# Altium PCB 板.PcbDoc (part 1 of 4)
Units mm, origin at the board's own origin, x right, y up, seen from the top; angles counter-clockwise.
Board outline 152.4 x 101.6 mm, 4 copper layers (Top Layer, VCC, GND, Bottom Layer); 183 components, 548 nets, 1331 pads, 689 vias.
Unrouted connection lines stored in the file: 6.
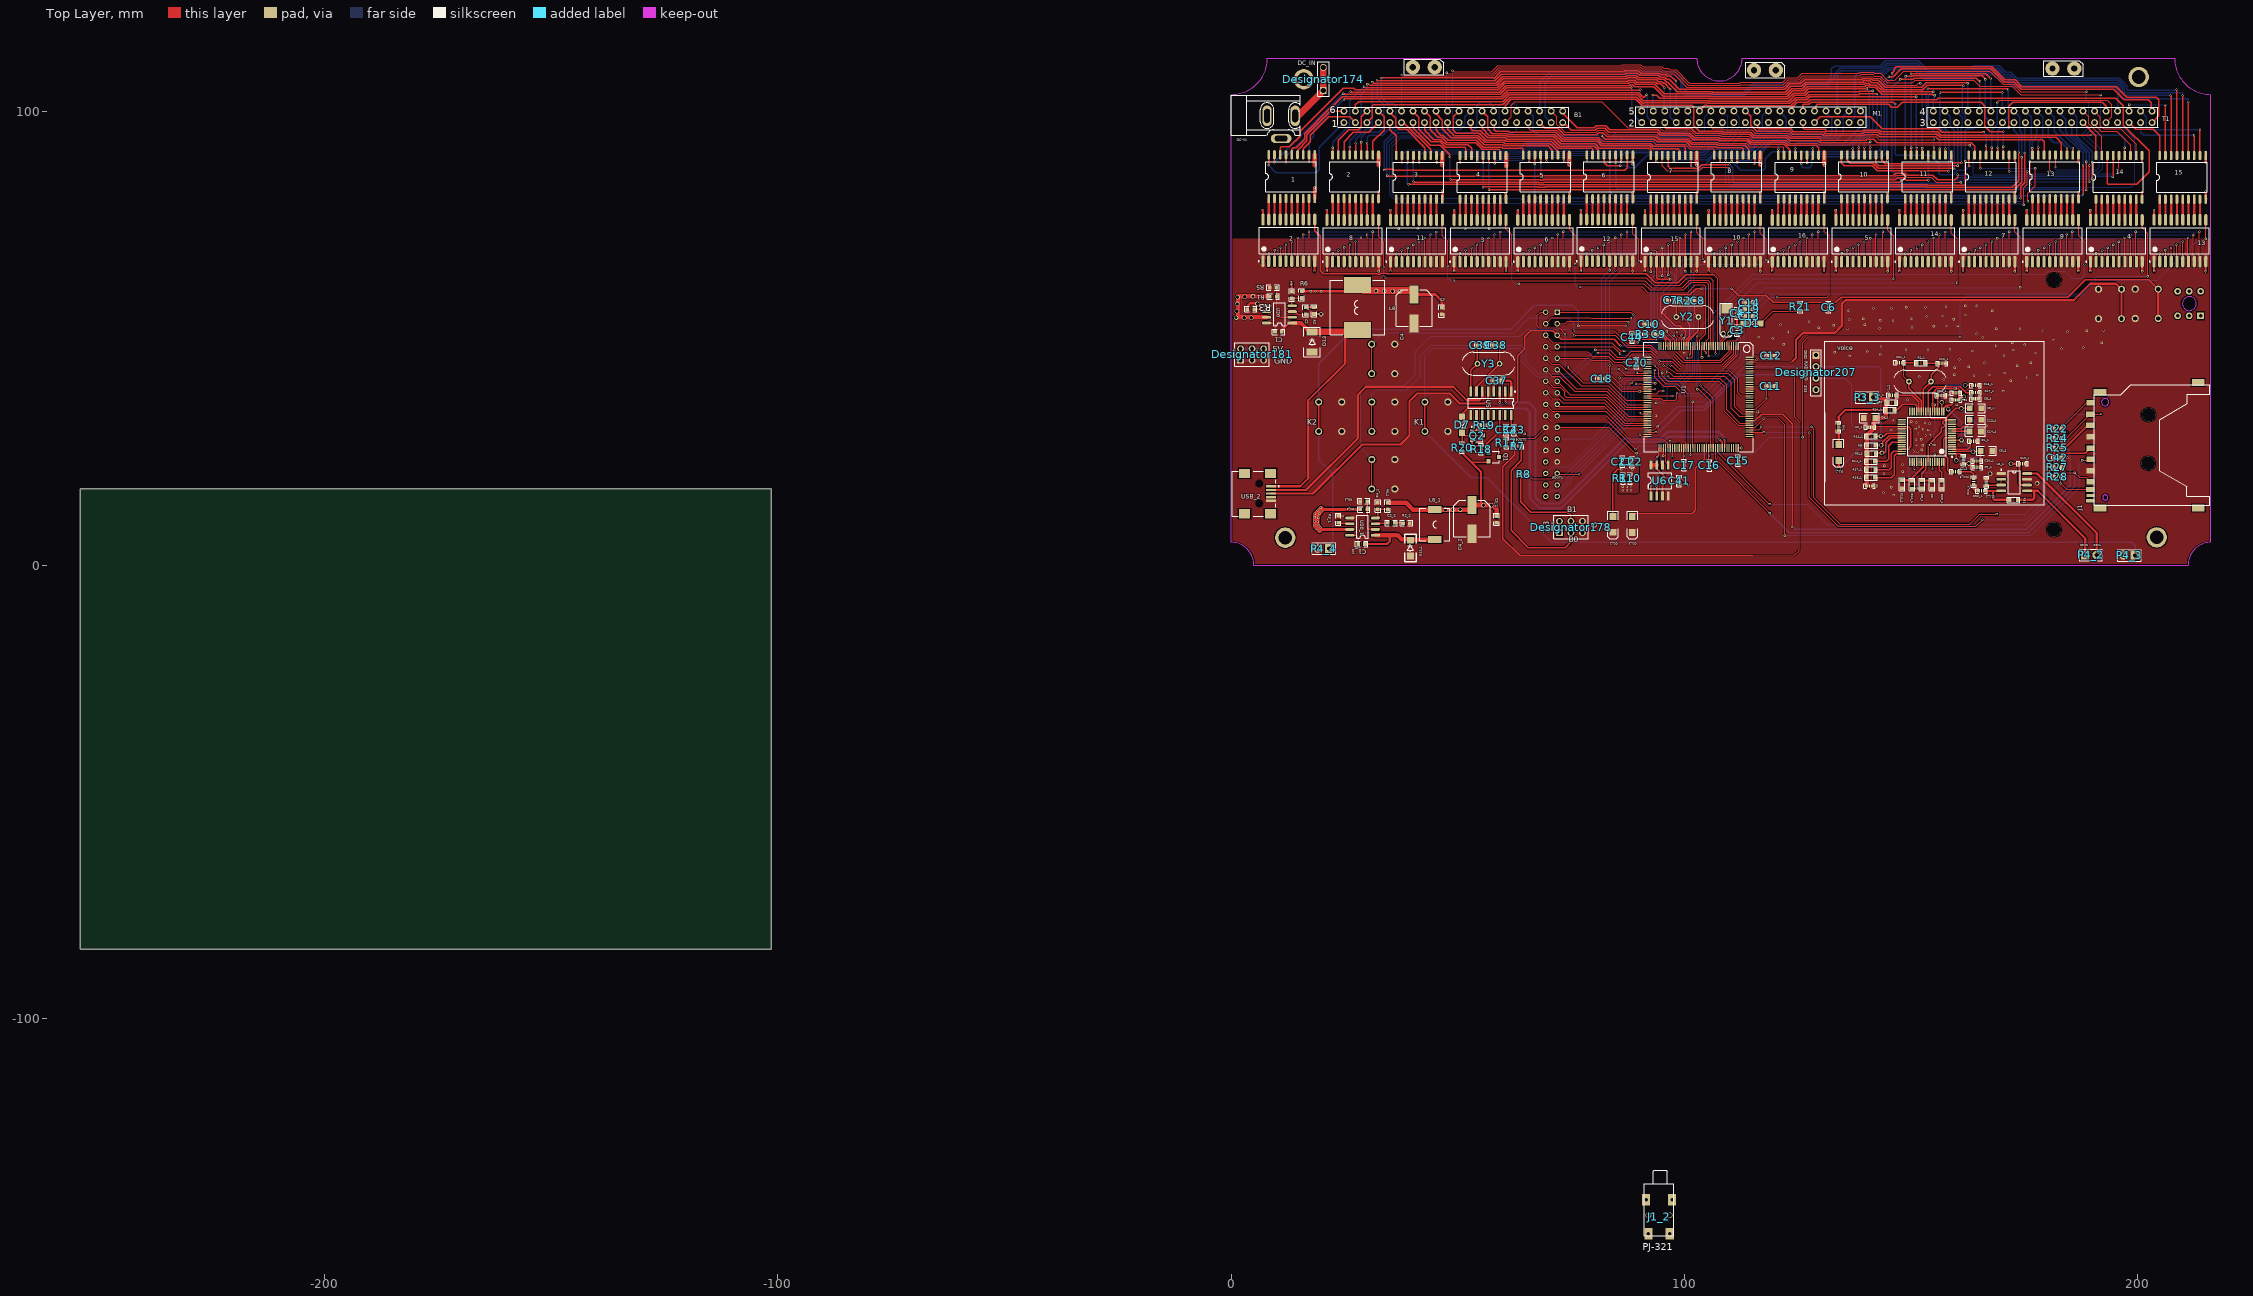
[diagram p0: Top Layer view]
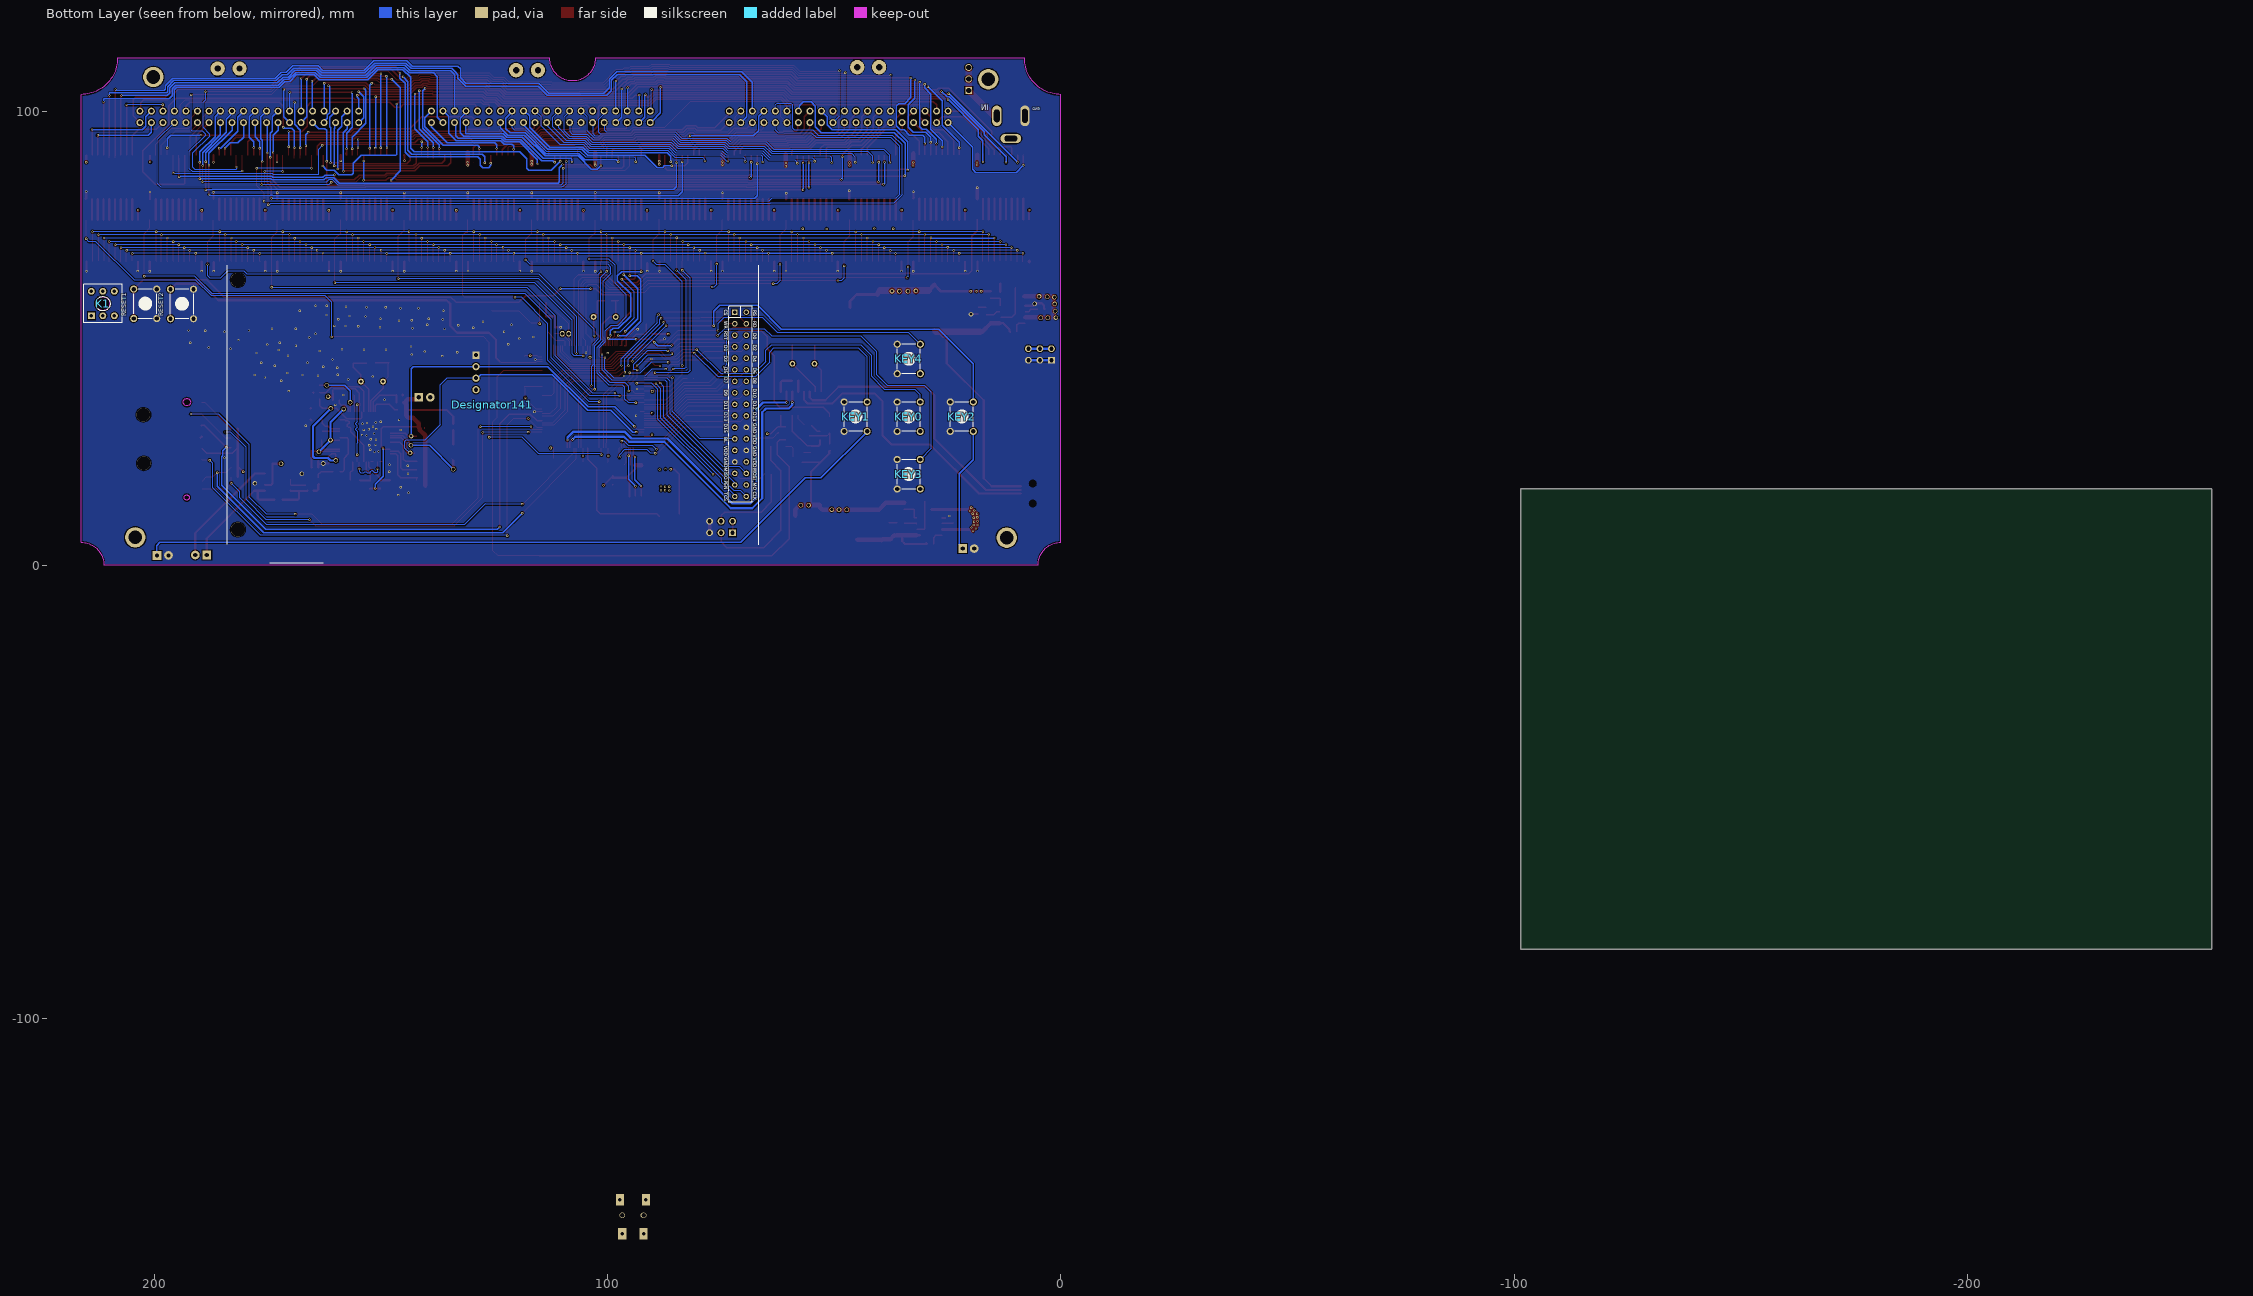
[diagram p1: Bottom Layer view, seen from below]
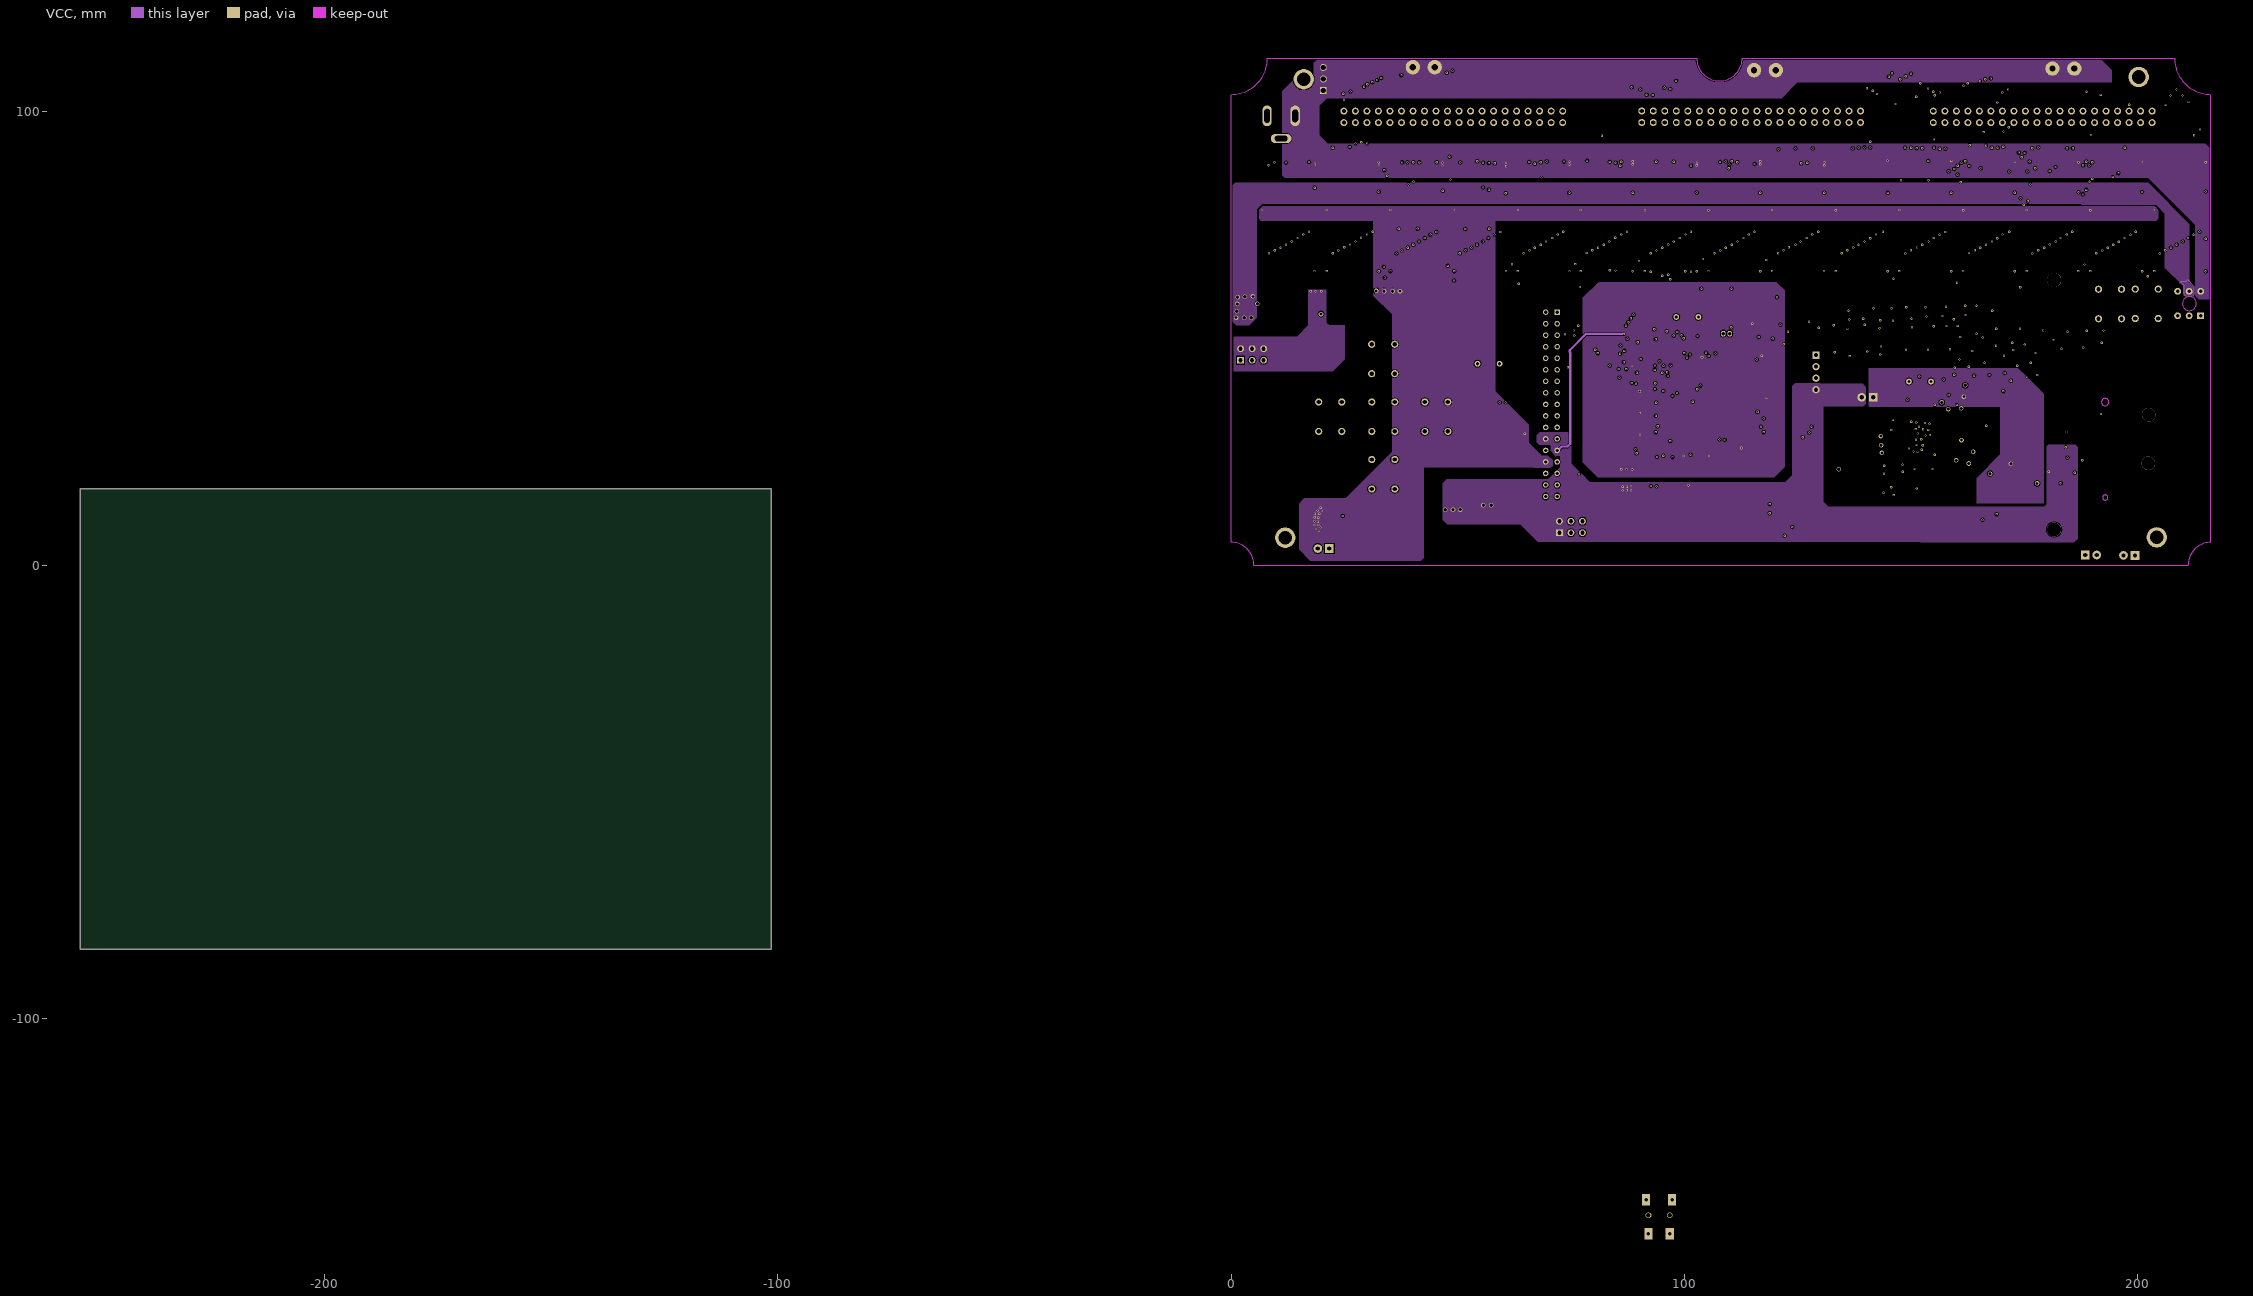
[diagram p2: VCC]
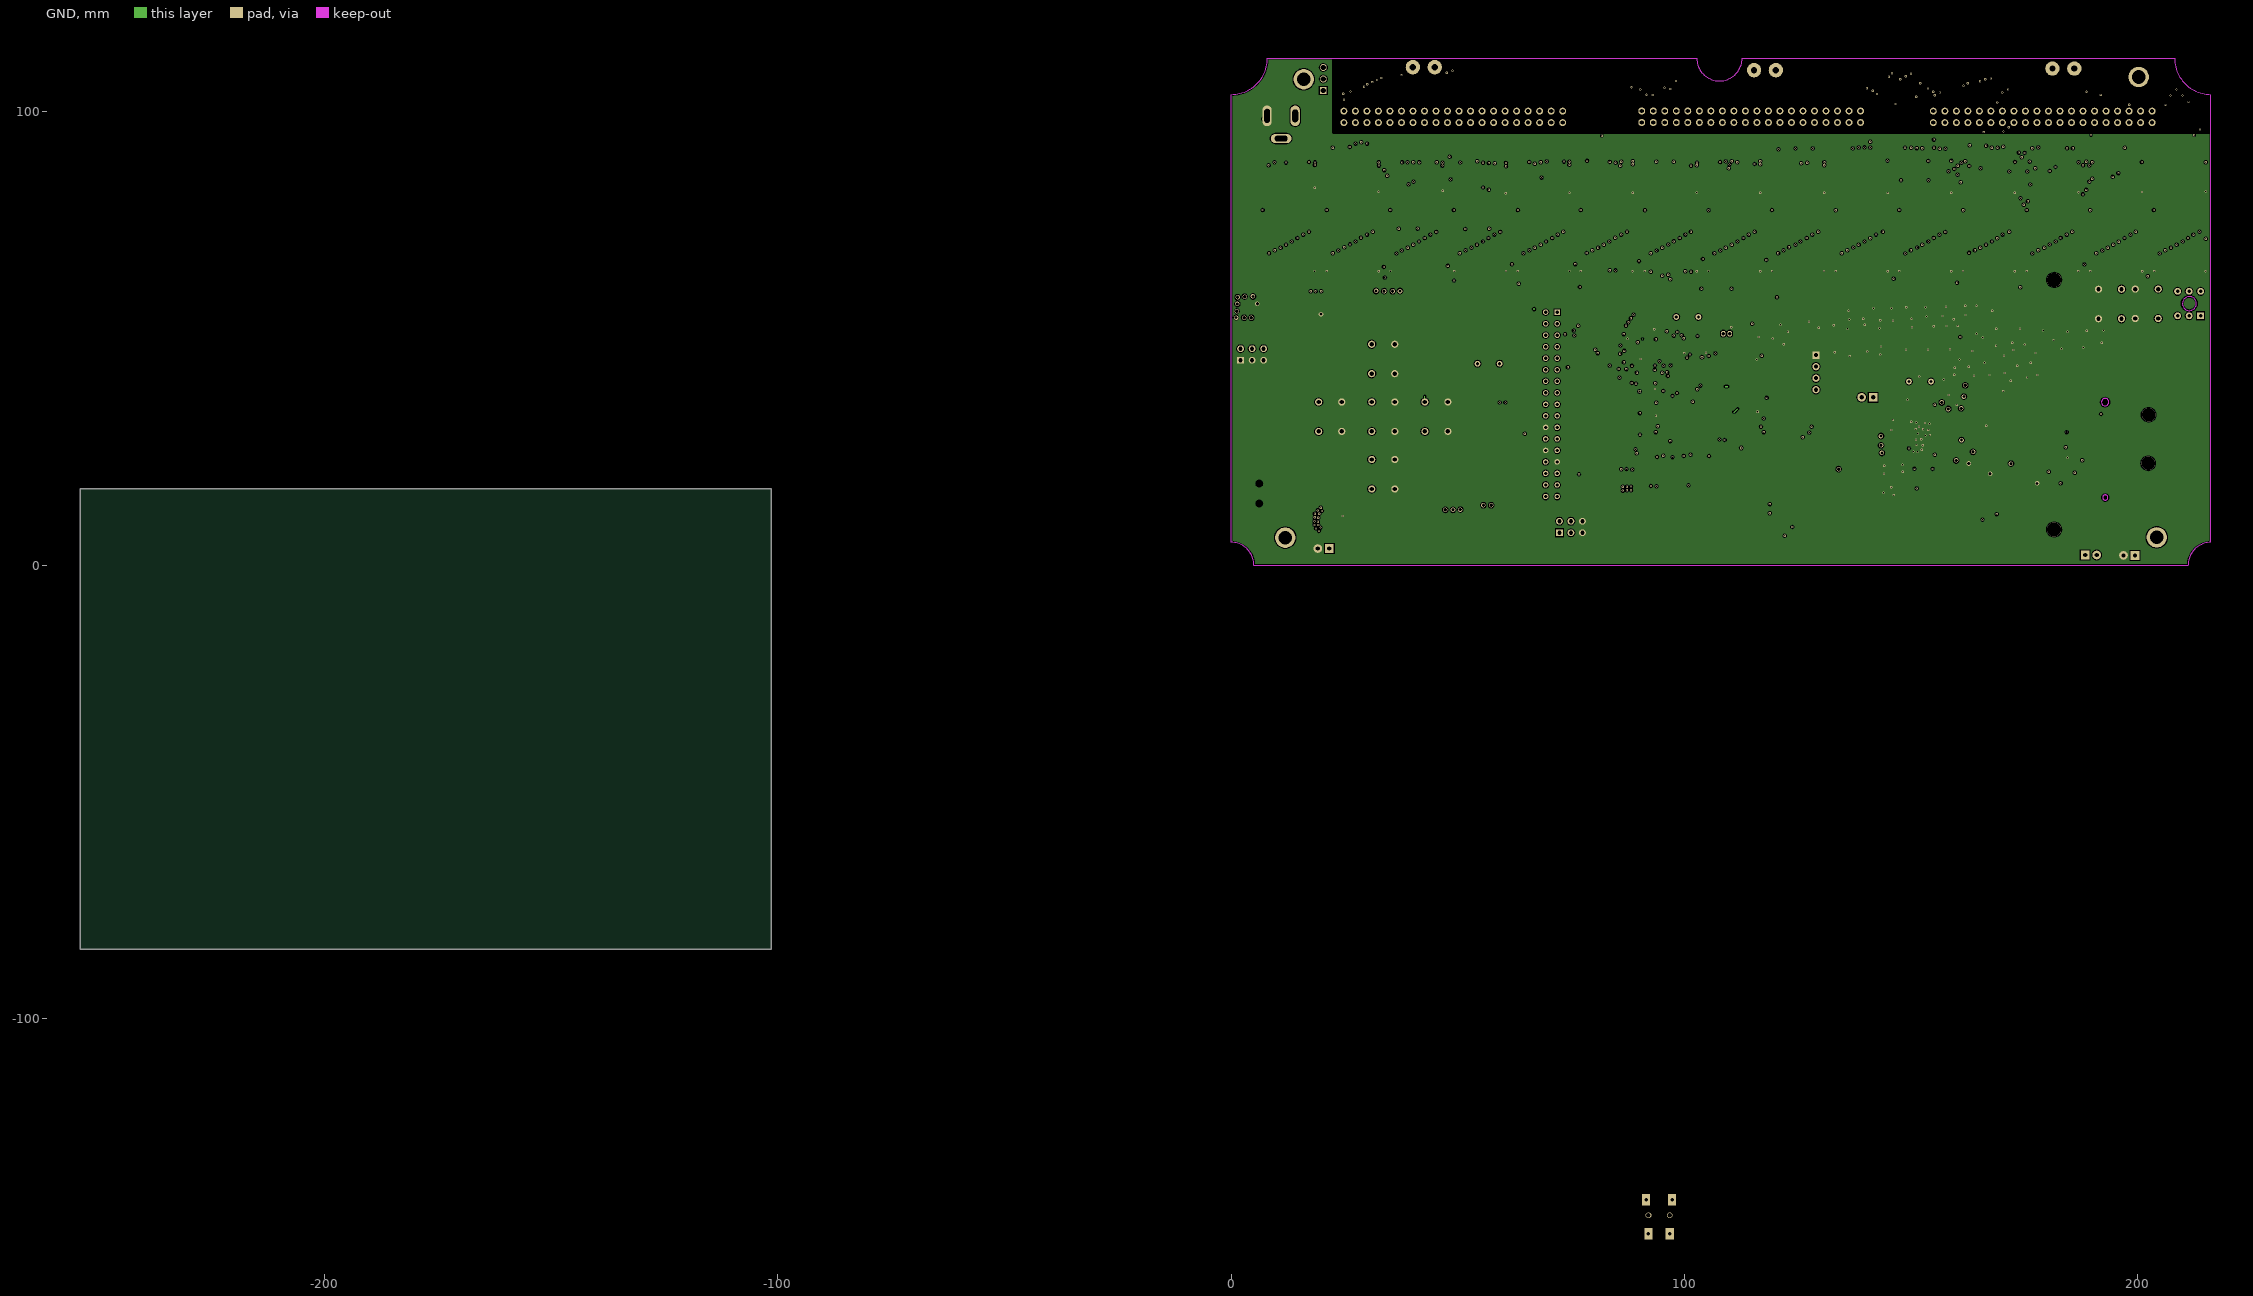
[diagram p3: GND]

## Layer stack, top to bottom
Top Solder: solder mask 0.0102, Solder Resist, Dk 3.5
Top Layer: signal copper 0.0356
Dielectric1: core 0.32, FR-4, Dk 4.8
VCC: signal copper 0.0356
Dielectric2: prepreg 0.32, FR-4, Dk 4.8
GND: signal copper 0.0356
Dielectric3: core 0.32, FR-4, Dk 4.8
Bottom Layer: signal copper 0.0356
Bottom Solder: solder mask 0.0102, Solder Resist, Dk 3.5

## Board outline
-253.83,-84.735 -101.43,-84.735 -101.43,16.865 -253.83,16.865

## Design rules (kind name [scope] priority, off if disabled: settings)
Clearance Clearance_1 [InNet('GND')] p1: gap=0.2 ignorepadtopadclearanceinfootprint=FALSE except(0: Arc-Hole Track-Hole SMDPad-Hole THPad-Hole Via-Hole Fill-Hole Poly-Hole Region-Hole Text-Hole)
Clearance [All] p2: gap=0.2 ignorepadtopadclearanceinfootprint=FALSE except(0: Arc-Hole Track-Hole SMDPad-Hole THPad-Hole Via-Hole Fill-Hole Poly-Hole Region-Hole Text-Hole)
ComponentClearance [All] p1: gap=0 collisioncheckmode=3 verticalgap=0 showdistances=FALSE
FabricationTestPointUsage TestPointUsage [All] p1: valid=0 allowmultiple=FALSE
FabricationTestpoint Testpoint [(IsPad And (OnTopLayer Or OnBottomLayer))] p1: side=3 testpointundercomponent=TRUE minsize=1.016 maxsize=2.54 preferedsize=1.524 minholesize=0 maxholesize=1.016 preferedholesize=0.813 testpointgrid=0.025 allowsidetop=TRUE allowsidebottom=TRUE usegrid=TRUE gridtolerance=0
HoleSize [All] p1: absolutevalues=TRUE maxlimit=4 minlimit=0.025 maxpercent=80.000 minpercent=20.000
PolygonConnect [All] p1: connectstyle=Direct reliefconductorwidth=0.254 reliefentries=2 polygonreliefangle="90 Angle" airgapwidth=0.254
RoutingCorners [All] p1: cornerstyle=Round minsetback=2.54 maxsetback=2.54
RoutingVias [All] p1: holewidth=0.3 width=0.5 viastyle="Through Hole" minholewidth=0.3 minwidth=0.4 maxholewidth=0.7 maxwidth=0.7
SolderMaskExpansion [All] p1: expansion=0.102
Width [All] p1: maxlimit=5 minlimit=0.2 preferedwidth=3 toplayer_prefwidth=0.2 midlayer1_minwidth=0.254 midlayer1_maxwidth=3 midlayer1_prefwidth=0.254 midlayer2_minwidth=0.254 midlayer2_maxwidth=3 midlayer2_prefwidth=0.254 minimp=50.000000 maximp=50.000000 favimp=50.000000
25 further rules are at their usual default settings.

## Classes and differential pairs
component class SHEET2: 2 8 9 10 12 13 14 16 573_1 573_2 573_3 573_4 573_5 573_6 573_7 573_8 573_9 573_10 573_11 573_12 573_13 573_14 573_15 B DY4 Jzong M T
component class SHEET3: C83 C84 C85 C86 C87 C88 C89 C90 C92 C93 C94 C95 C96 C97 C98 C99 D7 K1 Q2 R67 R68 R69 R70 R71 U16 U17 U18 U19 USB_232
component class Sheet4: BEEP C41 C42 C44 CAN DS0 DS1 KEY0 KEY1 KEY2 "KEY UP" P13 P14 R22 R24 R25 R27 R28 SYS TPAD TPAD1 U6 U15 USB
component class SHEET1: 2.4/2.8LCD BAT BOOT C3 C4 C7 C8 C9 C10 C11 D1 D2 JTAG R2 R3 RESET Y1

## Components (designator, comment, footprint, x,y, rotation, side; value= is the part's Value field where it differs from the comment)
1 "uln2803" sol-18 8.28,80.823 r90 top (schematic designator FD1)
2 "74HC573" SO20_M 12.725,71.603 r90 top
2 "uln2803" sol-18 22.352,80.797 r90 top (schematic designator FD7)
3 "uln2803" sol-18 36.398,80.696 r90 top (schematic designator FD10)
3 "74HC573" SO20_M 54.889,71.501 r90 top
4 "uln2803" sol-18 50.47,80.67 r90 top (schematic designator FD2)
4 "74HC573" SO20_M 195.206,71.501 r90 top
5 "uln2803" sol-18 64.44,80.747 r90 top (schematic designator FD5)
5 "74HC573" SO20_M 139.079,71.501 r90 top
6 "uln2803" sol-18 78.435,80.772 r90 top (schematic designator FD11)
6 "74HC573" SO20_M 68.921,71.501 r90 top
7 "74HC573" SO20_M 167.142,71.501 r90 top
7 "uln2803" sol-18 92.532,80.696 r90 top (schematic designator FD14)
8 "74HC573" SO20_M 26.825,71.501 r90 top
8 "uln2803" sol-18 106.553,80.747 r90 top (schematic designator FD9)
9 "74HC573" SO20_M 181.174,71.501 r90 top
9 "uln2803" sol-18 120.65,80.721 r90 top (schematic designator FD15)
10 "74HC573" SO20_M 111.016,71.501 r90 top
10 "uln2803" sol-18 134.595,80.772 r90 top (schematic designator FD4)
11 "74HC573" SO20_M 40.857,71.501 r90 top
11 "uln2803" sol-18 148.666,80.772 r90 top (schematic designator FD13)
12 "74HC573" SO20_M 82.855,71.603 r90 top
12 "uln2803" sol-18 162.687,80.747 r90 top (schematic designator FD6)
13 "74HC573" SO20_M 209.245,71.526 r90 top
13 "uln2803" sol-18 176.729,80.768 r90 top (schematic designator FD8)
14 "74HC573" SO20_M 153.111,71.501 r90 top
14 "uln2803" sol-18 190.729,80.67 r90 top (schematic designator FD3)
15 "74HC573" SO20_M 97.003,71.504 r90 top
15 "uln2803" sol-18 204.775,80.67 r90 top (schematic designator FD12)
16 "74HC573" SO20_M 125.047,71.501 r90 top
B1 "dubangxian" 杜邦线插脚 24.859,100.101 r0 top
C1 "100nf" 0603R 11.176,51.41 r180 top
C1 "0.1uF" 0603P 140.818,17.424 r180 top
C1_1 "100nf" 0603R 29.515,4.623 r180 top
C2 "220PF" 0603R 16.434,55.32 r90 top
C2_1 "0.1uF" 0603P 161.519,23.139 r90 top (schematic designator C2)
C2_2 "220PF" 0603R 34.569,9.296 r0 top
C3 "104" 0603R 46.431,55.296 r90 top
C3 "10" 0603P 111.582,51.74 r270 top
C3_1 "0.1uF" 0603P 140.945,30.404 r0 top (schematic designator C3)
C3_2 "104" 0603R 58.522,9.322 r90 top
C4 "220uF/35V" C-0808-S 40.361,59.639 r90 top (schematic designator C49)
C4 "10" 0603P 111.582,55.524 r90 top
C4_1 "10uF" 0805 140.792,32.436 r180 top (schematic designator C4)
C4_2 "220uF/35V" C-0808-S 53.137,13.233 r90 top (schematic designator C49)
C5 "0.1uF" 0603P 159.88,37.975 r0 top
C6 "104" 0603P 131.748,56.883 r90 top
C6_1 "10uF" 0805 166.572,25.171 r0 top (schematic designator C6)
C7 "22" 0603P 96.914,58.345 r0 top
C7_1 "0.1uF" 0603P 164.49,21.514 r0 top (schematic designator C7)
C8 "22" 0603P 102.946,58.268 r180 top
C8_1 "10uF" 0805 164.186,34.595 r0 top (schematic designator C8)
C9 "10uF" 0603P 94.31,50.876 r180 top
C9_1 "0.1uF" 0603P 164.109,36.652 r180 top (schematic designator C9)
C10 "104" 0603P 92.05,53.111 r180 top
C10_1 "0.1uF" 0603P 164.465,22.937 r0 top (schematic designator C10)
C11 "104" 0603P 119.024,39.395 r0 top
C11_1 "1uF" 0603P 163.779,18.39 r90 top (schematic designator C11)
C11_2 "1uF" 0603P 165.506,16.358 r180 top (schematic designator C11)
C11_3 "1uF" 0603P 159.766,20.613 r180 top (schematic designator C11)
C12 "104" 0603P 119.101,46.126 r0 top
C13 "104" 0603P 114.224,54.839 r180 top
C13_1 "10uF" 0805 164.16,32.029 r0 top (schematic designator C13)
C14 "104" 0603P 114.224,57.836 r180 top
C14_1 "10uF" 0805 164.109,29.464 r0 top (schematic designator C14)
C15 "104" 0603P 111.823,23 r270 top
C15_1 "27pF" 0603P 156.769,44.45 r180 top (schematic designator C15)
C16 "104" 0603P 105.461,21.996 r270 top
C16_1 "0.1uF" 0603P 164.186,39.624 r0 top (schematic designator C16)
C17 "104" 0603P 99.898,22.047 r270 top
C17_1 "1uF" 0603P 164.16,38.049 r0 top (schematic designator C17)
C18 "104" 0603P 81.712,41.072 r180 top
C19 "104" 0603P 114.224,56.388 r180 top
C19_1 "0.1uF" 0603P 174.549,22.352 r0 top (schematic designator C19)
C20 "104" 0603P 89.408,44.602 r90 top
C20_1 "10uF" 0603P 145.84,37.443 r180 top (schematic designator C20)
C21 "104" 0603P 86.29,22.821 r90 top
C21_1 "27pF" 0603P 147.422,44.628 r0 top (schematic designator C21)
C22 "104" 0603P 88.367,22.733 r90 top (schematic designator C21)
C32 "104" 0603P 60.681,29.794 r270 top
C34_1 "104" 0603P 156.54,37.387 r0 top (schematic designator C34)
C37 "104" 0603P 58.623,40.665 r180 top
C38 "22" 0603P 58.471,48.489 r0 top
C39 "22" 0603P 54.966,48.514 r180 top
C41 "104" 0603P 98.806,18.542 r270 top
C42 "104" 0603P 182.245,23.693 r180 top
C43 "10u" 0603P 62.382,29.82 r270 top
C44 "104" 0603P 88.39,50.178 r90 top
D1 "1N4148" DIODE_SOP 116.688,53.289 r180 top
D1_1 "LED2" 3.2X1.6X1.1 133.985,24.818 r270 top (schematic designator D1)
D1_2 "LED2" 3.2X1.6X1.1 84.201,8.969 r270 top (schematic designator D1)
D1_3 "LED2" 3.2X1.6X1.1 88.468,8.943 r270 top (schematic designator D1)
D7 "1N4148" DIODE_SOP 50.927,32.715 r270 top
D13 "HER207" DO-214AA 17.831,46.935 r90 top
D13_1 "SS34" 1206D-N 39.573,2.032 r90 top (schematic designator D9)
DC_IN "POWER" DC10B 3.472,94.742 r0 top
Designator141 "" db2*17-4.3 71.907,55.753 r270 bottom locked
Designator174 "" HDR1X3 20.32,104.648 r90 top
Designator178 "" HDR2X3 72.39,7.112 r0 top
Designator181 "" HDR2X3 2.083,45.161 r0 top
Designator207 "Comment" "Header 2.54X4" 128.981,42.469 r270 top
FB1 "100M/600R" 0603P 159.817,36.398 r0 top
J1 "SDCARD" SDCARD_L 189.484,33.274 r90 top
J1_2 "PJ-321" PCBComponent_1 828.497,503.149 r0 top (schematic designator J1)
K1 "BUTTON" BTN8.5*8.5 213.817,54.966 r90 bottom
KEY0 "KEY_M" KEY_M 36.093,29.464 r90 bottom
KEY1 "KEY_M" KEY_M 47.803,29.464 r90 bottom
KEY2 "KEY_M" KEY_M 24.384,29.464 r90 bottom
KEY3 "KEY_M" KEY_M 36.093,16.764 r90 bottom (schematic designator KEY0)
KEY4 "KEY_M" KEY_M 36.068,42.192 r90 bottom (schematic designator KEY0)
L8 "330uH/CD127" L1270 27.889,56.794 r90 top
L8_1 "10uH" L0630 44.933,8.915 r90 top (schematic designator L4)
M1 "dubangxian" 杜邦线插脚 90.551,100.127 r0 top
P3_3 "Header 2" HDR1X2 141.58,36.982 r180 top (schematic designator P3)
P4_2 "Header 2" HDR1X2 188.34,2.21 r0 top (schematic designator P4)
P4_3 "Header 2" HDR1X2 199.339,2.108 r180 top locked (schematic designator P4)
P4_4 "Header 2" HDR1X2 21.641,3.632 r180 top locked (schematic designator P4)
Q1 "S8550" SOT-23R 57.785,23.825 r270 top
Q2 "S8050" SOT-23R 54.153,28.524 r270 top
R1 "100K" 0603R 10.034,59.182 r180 top
R1_1 "10K" 0603P 163.703,27.33 r180 top (schematic designator R1)
R1_2 "100K" 0603R 29.999,12.268 r180 top
R2 "100K" 0603R 18.263,56.847 r270 top
R2 "1M" 0603P 99.873,58.318 r0 top
R2_1 "4.7M" R0603 150.782,43.926 r180 top (schematic designator R2)
R2_2 "68.1K" 0603R 37.897,9.246 r0 top
R3 "100K" 0603R 5.055,56.439 r180 top
R3 "10R" 0603P 90.768,50.9 r180 top
R3_1 "200K" 0603R 23.622,9.346 r90 top
R4 "40.2K" 0603R 13.36,58.776 r90 top
R4_1 "40.2K" 0603R 32.36,12.267 r90 top
R5 "24.9K" 0603R 8.482,61.189 r0 top
R5 "47K" R0603 153.984,19.094 r90 top
R5_1 "24.9K" 0603R 28.499,14.072 r0 top
R6 "210K" 0603R 15.545,60.377 r270 top
R6_1 "10K" R0603 142.585,25.162 r0 top (schematic designator R6)
R6_2 "124K" 0603R 34.493,12.241 r90 top
R7 "10K" 0603P 63.246,26.162 r0 top
R8 "10K" 0603P 64.516,20.066 r180 top (schematic designator R7)
R8_1 "47K" R0603 151.749,19.119 r90 top (schematic designator R8)
R9 "10K" R0603 142.512,26.991 r0 top
R10 "0" 0603P 87.986,19.075 r90 top
R10_1 "47K" R0603 147.355,19.17 r90 top (schematic designator R10)
R11 "0" 0603P 86.456,19.126 r90 top
R11_1 "10K" R0603 142.461,28.997 r0 top (schematic designator R11)
R12_1 "47K" R0603 150.765,16.394 r270 top (schematic designator R12)
R14_1 "10K" R0603 142.436,23.46 r0 top (schematic designator R14)
R17 "1K" 0603P 60.706,26.924 r90 top
R17_1 "10K" R0603 142.461,21.657 r0 top (schematic designator R17)
R18 "1K" 0603P 55.118,25.578 r270 top
R18_1 "10K" R0603 142.458,19.904 r0 top (schematic designator R18)
R19 "1K" 0603P 55.778,30.785 r180 top
R20 "10K" 0603P 50.925,25.895 r90 top
R21 "1K" 0603P 125.501,56.921 r90 top (schematic designator R17)
R22 "47k" 0603P 182.245,30.048 r180 top
R23_1 "10K" R0603 156.118,19.094 r90 top (schematic designator R23)
R24 "47k" 0603P 182.245,27.93 r180 top
R24_1 "10K" R0603 143.952,33.563 r180 top (schematic designator R24)
R25 "47k" 0603P 182.245,25.811 r180 top
R27 "47k" 0603P 182.245,21.575 r180 top
R28 "47k" 0603P 182.245,19.456 r180 top
R30 "10K" R0603 147.008,36.412 r0 top
R31 "22K" R0603 173.907,14.976 r0 top
R32_1 "105" 0603P 166.572,18.326 r90 top (schematic designator C32)
RESET1 "KEY_M" KEY_M 204.47,54.356 r90 bottom
RESET2 "KEY_M" KEY_M 196.367,54.318 r90 bottom (schematic designator RESET1)
RX1 "1K" 0603P 133.985,30.429 r270 top
T1 "dubangxian" 杜邦线插脚 154.856,100.101 r0 top
U1 "STM32F103ZET6" LQFP144 111.822,48.303 r270 top
U1_1 "XFS5152CE" LQFP64_N 153.441,28.296 r180 top (schematic designator U1)
U2_1 "HXJ8002" SOP-8 169.839,20.168 r0 top (schematic designator U2)
U5 "CH340G" SOP16M 57.302,35.636 r180 top
U6 "W25Q128" SOIC-8 92.583,15.189 r90 top
U20 "MP1584" SO-8N 13.462,53.365 r180 top
U20_1 "MP1584" SO-8N 31.801,6.579 r180 top (schematic designator U20)
USB_2 "USB" USB/SM0.8-6H5 0.932,15.748 r180 top (schematic designator USB_1)
Y1 "32.768K" XTAL32 108.534,51.029 r90 top
Y1_2 "12M" XTAL_US 154.359,40.462 r180 top (schematic designator Y1)
Y2 "8MHz" XTAL_US 98.171,54.712 r0 top
Y3 "12.288MHz" XTAL_US 59.207,44.399 r180 top
? "" N1A 115.316,109.144 r270 top
? "" N1A 181.127,109.499 r270 top
? "" N1A 40.081,109.804 r270 top

## Footprints (in the part's own frame and the unit in brackets; to place one, negate y for a bottom-side part, rotate by r counter-clockwise, add the part's x,y. Pads: shape width x height; smd on the part's side, far side on the other; paste and mask are expansions set on the pad)
3.2X1.6X1.1 [mm] "SMT LED; 2 Flat Leads"
  rect 1.5x1.5 smd: 1(-1.75,0) 2(1.75,0)
  silkscreen extent -2.9,-1.15 3.2,1.15
0603P [mil]
  rect 30x30 smd: 1(-27,0) 2(27.5,-0.06)
  silkscreen extent -50,-20 50,20
0603R [mm]
  rect 0.8x0.8 smd: 1(0,0) 2(1.5,0)
  silkscreen extent -0.6,-0.6 2.1,0.6
0805 [mm]
  rect 1.27x1.27 smd: 1(-1.27,0) 2(1.27,0)
  silkscreen extent -2.16,-1.02 2.16,1.02
1206D-N [mil]
  rect 60x60 smd: 1(0,0) 2(135,0)
  silkscreen extent -50,-50 185,50
BTN8.5*8.5 [mm]
  rect 1.5x1.5 hole 0.8: 1(0,0)
  round 1.5 hole 0.8: 2(0,-2.54) 3(0,-5.08) 4(5.4,-5.08) 5(5.4,-2.54) 6(5.4,0)
  silkscreen extent -1.55,-6.79 6.95,1.71
C-0808-S [mm]
  rect 4x2 smd: 1(0,0) 2(-6.35,0)
  silkscreen extent -6.98,-4 1.02,4
db2*17-4.3 [mm]
  rect 1.2x1.2 hole 0.7: 1(-0.002,0.006)
  round 1.2 hole 0.7: 2(-0.002,2.546) 3(2.538,0.006) 4(2.538,2.546) 5(5.08,0) 6(5.078,2.546) 7(7.62,0) 8(7.62,2.54) 9(10.158,0.006) 10(10.158,2.546) 11(12.698,0.006) 12(12.698,2.546) 13(15.238,0.006) 14(15.238,2.546) 15(17.778,0.006) 16(17.778,2.546) 17(20.318,0.006) 18(20.318,2.546) 19(22.858,0.006) 20(22.858,2.546) 21(25.398,0.006) 22(25.398,2.546) 23(27.938,0.006) 24(27.938,2.546) 25(30.478,0.006) 26(30.478,2.546) 27(33.018,0.006) 28(33.018,2.546) 29(35.558,0.006) 30(35.558,2.546) 31(38.098,0.006) 32(38.098,2.546) 33(40.638,0.006) 34(40.638,2.546)
  round 3.1 hole 3.1: ""(-7.125,-109.596) ""(47.925,-109.596)
  silkscreen extent -10.4,-111.89 51.25,5.33
DC10B [mil]
  oval 80x180 hole 50 slot 110 at 90 deg: 1(419.09,170)
  oval 80x180 hole 50 slot 120 at 90 deg: 2(175,170)
  oval 180x80 hole 50 slot 110 at 0 deg: 3(297.05,-26.85)
  silkscreen extent -138,0 465,350
DIODE_SOP [mm]
  rect 1.5x1.3 smd: 1(0,0) 2(3.556,0)
  silkscreen extent 1.14,-1.02 2.56,1.02
DO-214AA [mm]
  rect 1.524x2.5 smd: 1(0,0) 2(4.5,0)
  silkscreen extent -1,-1.8 5.5,1.8
HDR1X2 [mil] "Connector; Header; 2 Position"
  rect 75x75 hole 38: 1(0,0)
  round 75 hole 38: 2(100,0)
  silkscreen extent -50,-50 150,50
HDR1X3 [mm] "Connector; Header; 3 Position"
  rect 1.5x1.5 hole 1.2: 1(0,0)
  round 1.5 hole 1.2: 2(2.54,0) 3(5.08,0)
  silkscreen extent -1.27,-1.27 6.35,1.27
HDR2X3 [mm] "Connector; Header; 3x2 Position"
  rect 1.5x1.5 hole 0.9: 1(0,0)
  round 1.5 hole 0.9: 2(0,2.54) 3(2.54,0) 4(2.54,2.54) 5(5.08,0) 6(5.08,2.54)
  silkscreen extent -1.27,-1.27 6.35,3.81
"Header 2.54X4" [mm]
  rect 1.6x1.6 hole 0.9: 1(-3.81,0)
  round 1.6 hole 0.9: 2(-1.27,0) 3(1.27,0) 4(3.81,0)
  silkscreen extent -4.95,-1.14 5.19,1.14, body extent -4.95,-1.23 5.21,1.27, height 8.3
KEY_M [mil]
  round 62 hole 38: 1(0,0) 1(255.9,0) 2(0,-200) 2(255.9,-200)
  silkscreen extent 0,-200 255,0
L0630 [mm]
  rect 1.5x3 smd: 1(-3.3,0) 2(3.3,0)
  silkscreen extent -3.6,-3.3 3.6,3.3
L1270 [mm]
  rect 3.5x6 smd: 1(-5,0) 2(5,0)
  silkscreen extent -6,-6 6,6
LQFP64_N [mm] "Thin QFP, 64-Leads, Body 10x10mm, Pitch 0.5mm, IPC Medium Density"
  oval 1.8x0.3 smd: 1(-5.55,3.75) 2(-5.55,3.25) 3(-5.55,2.75) 4(-5.55,2.25) 5(-5.55,1.75) 6(-5.55,1.25) 7(-5.55,0.75) 8(-5.55,0.25) 9(-5.55,-0.25) 10(-5.55,-0.75) 11(-5.55,-1.25) 12(-5.55,-1.75) 13(-5.55,-2.25) 14(-5.55,-2.75) 15(-5.55,-3.25) 16(-5.55,-3.75) 33(5.55,-3.75) 34(5.55,-3.25) 35(5.55,-2.75) 36(5.55,-2.25) 37(5.55,-1.75) 38(5.55,-1.25) 39(5.55,-0.75) 40(5.55,-0.25) 41(5.55,0.25) 42(5.55,0.75) 43(5.55,1.25) 44(5.55,1.75) 45(5.55,2.25) 46(5.55,2.75) 47(5.55,3.25) 48(5.55,3.75)
  oval 0.3x1.8 smd: 17(-3.75,-5.55) 18(-3.25,-5.55) 19(-2.75,-5.55) 20(-2.25,-5.55) 21(-1.75,-5.55) 22(-1.25,-5.55) 23(-0.75,-5.55) 24(-0.25,-5.55) 25(0.25,-5.55) 26(0.75,-5.55) 27(1.25,-5.55) 28(1.75,-5.55) 29(2.25,-5.55) 30(2.75,-5.55) 31(3.25,-5.55) 32(3.75,-5.55) 49(3.75,5.55) 50(3.25,5.55) 51(2.75,5.55) 52(2.25,5.55) 53(1.75,5.55) 54(1.25,5.55) 55(0.75,5.55) 56(0.25,5.55) 57(-0.25,5.55) 58(-0.75,5.55) 59(-1.25,5.55) 60(-1.75,5.55) 61(-2.25,5.55) 62(-2.75,5.55) 63(-3.25,5.55) 64(-3.75,5.55)
  silkscreen extent -5.68,-4.25 4.25,4.57, body extent -5,-5 5,5, height 1.6
LQFP144 [mm]
  rect 1.8x0.254 smd: 1(-0.009,0.001) 2(-0.009,-0.499) 3(-0.009,-0.999) 4(-0.009,-1.499) 5(-0.009,-1.999) 6(-0.009,-2.499) 7(-0.009,-2.999) 8(-0.009,-3.499) 9(-0.009,-3.999) 10(-0.009,-4.499) 11(-0.009,-4.999) 12(-0.009,-5.499) 13(-0.009,-5.999) 14(-0.009,-6.499) 15(-0.009,-6.999) 16(-0.009,-7.499) 17(-0.009,-7.999) 18(-0.009,-8.499) 19(-0.009,-8.999) 20(-0.009,-9.499) 21(-0.009,-9.999) 22(-0.009,-10.499) 23(-0.009,-10.999) 24(-0.009,-11.499) 25(-0.009,-11.999) 26(-0.009,-12.499) 27(-0.009,-12.999) 28(-0.009,-13.499) 29(-0.009,-13.999) 30(-0.009,-14.499) 31(-0.009,-14.999) 32(-0.009,-15.499) 33(-0.009,-15.999) 34(-0.009,-16.499) 35(-0.009,-16.999) 36(-0.009,-17.499) 73(22.491,-17.499) 74(22.491,-16.999) 75(22.491,-16.499) 76(22.491,-15.999) 77(22.491,-15.499) 78(22.491,-14.999) 79(22.491,-14.499) 80(22.491,-13.999) 81(22.491,-13.499) 82(22.491,-12.999) 83(22.491,-12.499) 84(22.491,-11.999) 85(22.491,-11.499) 86(22.491,-10.999) 87(22.491,-10.499) 88(22.491,-9.999) 89(22.491,-9.499) 90(22.491,-8.999) 91(22.491,-8.499) 92(22.491,-7.999) 93(22.491,-7.499) 94(22.491,-6.999) 95(22.491,-6.499) 96(22.491,-5.999) 97(22.491,-5.499) 98(22.491,-4.999) 99(22.491,-4.499) 100(22.491,-3.999) 101(22.491,-3.499) 102(22.491,-2.999) 103(22.491,-2.499) 104(22.491,-1.999) 105(22.491,-1.499) 106(22.491,-0.999) 107(22.491,-0.499) 108(22.491,0.001)
  rect 0.254x1.8 smd: 37(2.491,-19.999) 38(2.991,-19.999) 39(3.491,-19.999) 40(3.991,-19.999) 41(4.491,-19.999) 42(4.991,-19.999) 43(5.491,-19.999) 44(5.991,-19.999) 45(6.491,-19.999) 46(6.991,-19.999) 47(7.491,-19.999) 48(7.991,-19.999) 49(8.491,-19.999) 50(8.991,-19.999) 51(9.491,-19.999) 52(9.991,-19.999) 53(10.491,-19.999) 54(10.991,-19.999) 55(11.491,-19.999) 56(11.991,-19.999) 57(12.491,-19.999) 58(12.991,-19.999) 59(13.491,-19.999) 60(13.991,-19.999) 61(14.491,-19.999) 62(14.991,-19.999) 63(15.491,-19.999) 64(15.991,-19.999) 65(16.491,-19.999) 66(16.991,-19.999) 67(17.491,-19.999) 68(17.991,-19.999) 69(18.491,-19.999) 70(18.991,-19.999) 71(19.491,-19.999) 72(19.991,-19.999) 109(19.991,2.501) 110(19.491,2.501) 111(18.991,2.501) 112(18.491,2.501) 113(17.991,2.501) 114(17.491,2.501) 115(16.991,2.501) 116(16.491,2.501) 117(15.991,2.501) 118(15.491,2.501) 119(14.991,2.501) 120(14.491,2.501) 121(13.991,2.501) 122(13.491,2.501) 123(12.991,2.501) 124(12.491,2.501) 125(11.991,2.501) 126(11.491,2.501) 127(10.991,2.501) 128(10.491,2.501) 129(9.991,2.501) 130(9.491,2.501) 131(8.991,2.501) 132(8.491,2.501) 133(7.991,2.501) 134(7.491,2.501) 135(6.991,2.501) 136(6.491,2.501) 137(5.991,2.501) 138(5.491,2.501) 139(4.991,2.501) 140(4.491,2.501) 141(3.991,2.501) 142(3.491,2.501) 143(2.991,2.501) 144(2.491,2.501)
  silkscreen extent -0.81,-20.8 23.29,3.3
N1A [mil]
  round 125 hole 55: 1(0,0) 2(0,190)
  silkscreen extent -69,-74 65,268
PCBComponent_1 [mil]
  rect 70.87x98.43 hole 30: 2(-28995,-25615) 3(-28810,-25615) 4(-29015,-25320) 4(-28790,-25320)
  silkscreen extent -29030,-25635 -28775,-25065
R0603 [mm]
  rect 0.8x1 smd: 1(-2.25,-0.6) 2(-0.45,-0.6)
  silkscreen extent -2.75,-1.2 0.05,0
SDCARD_L [mm]
  rect 1.2x1.8 smd: 1(0,0) 2(-2.489,0) 3(-4.983,-0.009) 4(-7.483,-0.009) 5(-9.983,-0.009) 6(-12.483,-0.009) 7(-14.908,-0.009) 9(2.517,-0.009)
  rect 1.1x1.8 smd: 8(-16.612,0)
  rect 0.7x1.8 smd: 10(-17.908,-0.009) 12(-19.101,0)
  rect 1.5x2.8 smd: 11(-20.726,-2.143) 11(-20.726,-23.834) 11(4.826,-2.143) 11(7.01,-23.784)
  Keep-Out Layer circle w0.254: c-18.39,-3.3 r0.58
  Keep-Out Layer circle w0.254: c2.642,-3.26 r0.82
  silkscreen extent -20.13,-26.3 6.44,-0.9
SO20_M [mm] "SOIC, 20-Leads, Body 12.8x7.5mm, Pitch 1.27mm, IPC Low Density"
  oval 2.6x0.7 smd: 1(-4.6,5.715) 2(-4.6,4.445) 3(-4.6,3.175) 4(-4.6,1.905) 5(-4.6,0.635) 6(-4.6,-0.635) 7(-4.6,-1.905) 8(-4.6,-3.175) 9(-4.6,-4.445) 10(-4.6,-5.715) 11(4.6,-5.715) 12(4.6,-4.445) 13(4.6,-3.175) 14(4.6,-1.905) 15(4.6,-0.635) 16(4.6,0.635) 17(4.6,1.905) 18(4.6,3.175) 19(4.6,4.445) 20(4.6,5.715)
  silkscreen extent -4.72,-6.5 2.9,6.74, body extent -3.75,-6.5 3.75,6.5, height 2.65
SO-8N [mil]
  rect 80x24 smd: 1(0,0)
  oval 80x24 smd: 2(0,-50) 3(0,-100) 4(0,-150) 5(221.9,-150) 6(221.9,-100) 7(221.9,-50) 8(221.9,0)
  silkscreen extent 61,-175 161,25
SOIC-8 [mil]
  rect 80x24 smd: 1(0,0) 2(0,-50.06) 3(0,-100.06) 4(0,-150.06) 5(270,-150) 6(270,-100) 7(270,-50) 8(270,0)
  silkscreen extent 65,-175 205,25
sol-18 [mil]
  oval 80x24 smd: 1(0,0) 2(0,-50) 3(0,-100) 4(0,-150) 5(0,-200) 6(0,-250) 7(0,-300) 8(0,-350) 9(0,-400) 10(380,-400) 11(380,-350) 12(380,-300) 13(380,-250) 14(380,-200) 15(380,-150) 16(380,-100) 17(380,-50) 18(380,0)
  silkscreen extent 60,-412 320,25
SOP16M [mm]
  rect 0.6x2.2 smd: 1(-4.445,-2.6) 2(-3.175,-2.6) 3(-1.905,-2.6) 4(-0.635,-2.6) 5(0.635,-2.6) 6(1.905,-2.6) 7(3.175,-2.6) 8(4.445,-2.6) 9(4.445,2.6) 10(3.175,2.6) 11(1.905,2.6) 12(0.635,2.6) 13(-0.635,2.6) 14(-1.905,2.6) 15(-3.175,2.6) 16(-4.445,2.6)
  silkscreen extent -5.42,-2.72 5,1.1
SOP-8 [mm]
  oval 2.2x0.6 smd: 1(0,0) 2(0,-1.27) 3(0,-2.54) 4(0,-3.81) 5(5.7,-3.81) 6(5.7,-2.54) 7(5.7,-1.27) 8(5.7,0)
  silkscreen extent -0.12,-4.41 4.2,0.97
SOT-23R [mm]
  rect 0.9x0.95 smd: 1(0.95,-1.048) 2(-0.95,-1.048) 3(0,1.302)
  silkscreen extent -2.07,-1.17 1.3,1.3
USB/SM0.8-6H5 [mm]
  rect 2.3x0.5 smd: 1(-7.85,-1.6) 2(-7.85,-0.8) 3(-7.85,0) 4(-7.85,0.8) 5(-7.85,1.6)
  rect 2.5x2 smd: 6(-7.75,4.45) 7(-1.996,4.45) 8(-7.75,-4.45) 9(-1.996,-4.45)
  round 0.6 hole 1.27 unplated: MH1(-5.25,2.2) MH2(-5.25,-2.2)
  silkscreen extent -9.68,-4.95 0.7,4.95
XTAL32 [mil]
  oval 50x40 hole 27.99: 1(0,0.01) 2(0,-56.02)
  rect 92.13x86 smd: ""(220,-27)
  silkscreen extent -28,-77 264,25
XTAL_US [mil]
  round 50 hole 28: 1(0,0) 2(192.13,0)
  silkscreen extent -131,-98 323,98
杜邦线插脚 [mil]
  round 60 hole 36: 1(0,-100) 2(100,-100) 3(200,-100) 4(300,-100) 5(400,-100) 6(500,-100) 7(600,-100) 8(700,-100) 9(800,-100) 10(900,-100) 11(1000,-100) 12(1100,-100) 13(1200,-100) 14(1300,-100) 15(1400,-100) 16(1500,-100) 17(1600,-100) 18(1700,-100) 19(1800,-100) 20(1900,-100) 21(0,0) 22(100,0) 23(200,0) 24(300,0) 25(400,0) 26(500,0) 27(600,0) 28(700,0) 29(800,0) 30(900,0) 31(1000,0) 32(1100,0) 33(1200,0) 34(1300,0) 35(1400,0) 36(1500,0) 37(1600,0) 38(1700,0) 39(1800,0) 40(1900,0)
  silkscreen extent -53,-142 1951,35

## Part data
2 3 4 5 6 7 8 9 10 11 12 13 14 15 16: library part SN74HC573DW, "Octal D-Type Transparent Latch with 3-State Outputs"
C1 C2_1 C3_1 C5 C7_1 C9_1 C10_1 C11_1 C11_2 C11_3 C15_1 C21_1 C34_1 R32_1: library part "Cap NP", "电容"
C3 C4 C6 C7 C8 C9 C10 C11 C12 C13 C14 C15 C16 C17 C18 C19 C20 C21 C22 C32 C37 C38 C39 C41 C42 C43 C44: library part C
C4 C4_2: library part CAP3
C4_1 C6_1 C8_1 C13_1 C14_1 C20_1: library part "CAP POL"
C16_1 C17_1 C19_1: library part CAP, "Capacitor"
D1: library part D, "Typical RED, GREEN, YELLOW, AMBER GaAs LED"
D1_1 D1_2 D1_3: "Typical RED, GREEN, YELLOW, AMBER GaAs LED"
D7: library part D
D13 D13_1: library part DIODE1, "Diode"
DC_IN: library part POW
FB1: library part Fbead, "磁珠"
J1: "SD卡自弹"
L8 L8_1: library part L, "LB"
P3_3 P4_2 P4_3 P4_4: "Header, 2-Pin"
Q1: library part PNP, "8550/BCW68"
Q2: library part NPN, "8050/BCW846/BCW847"
R1_1 R6_1 R9 R11_1 R14_1 R17_1 R18_1 R23_1 R24_1 R30 R31: library part Res2, "Resistor"
R2 R3 R7 R8 R10 R11 R17 R18 R19 R20 R21 RX1: library part R
R2_1 R5 R8_1 R10_1 R12_1: library part RES2, "电阻"
R22 R24 R25 R27 R28: library part Res1, "贴片电阻"
U1_1: library part XFS5152-2
U5: "USB2UART"
U6: library part W25X16, "W25X16;SST25VF016;MX25L1605"
U20 U20_1: "DC-DC"
USB_2: library part USB5
Y1: library part XTAL_1, "Crystal Oscillator"
Y1_2: library part XTAL1, "晶振"
Y2: library part XTAL, "Crystal Oscillator"
Y3: library part XTAL_2, "Crystal Oscillator"

## Free pads (board coordinates)
  round 4.5 hole 3: 1(11.934,6.035) 1(15.998,107.127) 1(200.148,107.635) 1(204.132,6.096)
  round 0.6 hole 0.4: 15(103.835,45.822) 38(90.068,38.278) 41(112.497,25.806) 69(116.103,33.782)

## Via types
v1: diameter 0.5, hole 0.3, Top Layer to Bottom Layer, 646 vias
v2: diameter 1, hole 0.711, Top Layer to Bottom Layer, 35 vias
v3: diameter 0.5, hole 0.4, Top Layer to Bottom Layer, 2 vias
v4: diameter 1.27, hole 1.016, Top Layer to Bottom Layer, 2 vias
v5: diameter 1, hole 1, Top Layer to Bottom Layer, 2 vias
v6: diameter 3, hole 3, Top Layer to Bottom Layer, tented both sides, 2 vias

## Nets (pads, with @x,y where several pads share a name; then routed paths per layer and width w, separated by ;. In a path a pad name is that pad's centre, name@x,y a point inside that pad or via, vN(x,y) a via of type N, cw(c..) or ccw(c..) an arc to the next point about the centre after c; other vN are vias at no path point)
5V: 
12MI: C15_1.2 R2_1.1 U1_1.26 Y1_2.1 | length 15.1
  Top Layer w0.3: U1_1.26@152.691,33.846 152.691,38.795 Y1_2.1@154.359,40.462 154.359,41.939 156.041,43.621 156.041,44.422 C15_1.2@156.07,44.452 153.106,44.452 R2_1.1@153.032,44.526
12MO: C21_1.2 R2_1.2 U1_1.27 Y1_2.2 | length 15.6
  Top Layer w0.254: C21_1.2@148.12,44.626 148.374,44.372 148.374,41.567 Y1_2.2@149.479,40.462
  Top Layer w0.3: C21_1.2@148.12,44.626 151.132,44.626 R2_1.2@151.232,44.526 ; Y1_2.2@149.479,40.462 149.479,38.964 152.191,36.251 U1_1.27@152.191,33.846
A3: R23_1.2 U1_1.62 | length 4.3
  Top Layer w0.3: U1_1.62@156.191,22.746 156.191,20.948 156.718,20.422 R23_1.2@156.718,18.644
A4: R24_1.1 U1_1.29 | length 6.9
  Top Layer w0.3: R24_1.1@146.202,34.163 146.228,34.188 146.85,34.188 148.12,35.458 150.825,35.458 151.191,35.092 U1_1.29@151.191,33.846
"A OUTR": 
ADAC0: 
AREF: 
"ASEL A": 
"ASEL B": U1.137
AVDD: 
AVDD12: C17_1.1 U1_1.24 | length 15.3
  Top Layer w0.3: U1_1.24@153.691,33.846 153.691,38.325 154.737,39.37 160.745,39.37 162.117,37.998 163.424,37.998 C17_1.1@163.474,38.049
AVDD33: C6_1.1 C7_1.2 C10_1.2 FB1.1 U1_1.2 U1_1.7 U1_1.17 | length 29
  Top Layer w0.254: C10_1.2@165.164,22.682 165.245,22.764 C10_1.2@165.443,22.962
  Top Layer w0.3: U1_1.17@157.191,33.846 157.191,34.596 157.826,35.23 158.039,35.23 ; v2@158.064,34.214 158.039,34.239 158.039,35.23 ; U1_1.2@158.991,25.046 163.627,25.046 165.176,25.046 165.245,25.115 C6_1.1@165.302,25.171 ; U1_1.7@158.991,27.546 v2(161.073,27.546) ; FB1.1@159.131,36.398 159.106,36.373 159.106,35.636 158.699,35.23 158.039,35.23
  Top Layer w0.5: C7_1.2@165.189,21.512 165.245,21.569 165.245,22.764 165.245,22.962 C6_1.1@165.245,25.115
  Bottom Layer w0.5: v2(158.166,34.392) 161.073,31.484 v2(161.073,27.546) 161.073,27.534 163.627,24.98 v2(163.627,24.968)
B0: Designator178.3 R7.2 | length 36.8
  Top Layer w0.3: R7.2@63.944,26.16 63.944,23.05 61.722,20.828 61.722,7.62 65.532,3.81 73.66,3.81 74.93,5.08 Designator178.3@74.93,7.112
B1: Designator178.4 R8.2 | length 19.8
  Top Layer w0.3: R8.2@63.817,20.068 63.817,13.906 66.04,11.684 74.168,11.684 74.93,10.922 Designator178.4@74.93,9.652
BAUD1: R5.2@154.584,18.644 R8_1.2 U1_1.56 | length 6.7
  Top Layer w0.3: R8_1.2@152.349,18.669 152.273,18.745 152.273,20.142 153.191,21.061 U1_1.56@153.191,22.746
  Top Layer w0.5: R8_1.2@152.349,18.669 152.362,18.656 154.572,18.656 R5.2@154.584,18.644
BAUD2: R10_1.2 R12_1.1 U1_1.55 | length 7.4
  Top Layer w0.254: R10_1.2@147.955,18.72 R10_1.2@147.963,18.727
  Top Layer w0.3: R12_1.1@150.165,18.644 150.241,18.72 150.241,19.202 152.691,21.653 U1_1.55@152.691,22.746
  Top Layer w0.5: R10_1.2@147.955,18.72 147.993,18.682 150.127,18.682 R12_1.1@150.165,18.644
BEEP: U1.139
BN0: 
BOOT0: R7.1 R17.2 U1.138 | length 140.9
  Top Layer w0.254: U1.138@114.402,42.814 122.997,42.814 124.308,41.504 124.308,32.563 125.247,31.623 125.247,3.175 124.104,2.032 115.087,2.032
  Top Layer w0.3: R17.2@60.708,27.622 62.039,27.622 62.56,27.102 R7.1@62.56,26.162 62.56,24.333 59.944,21.717 59.944,5.842 63.754,2.032 115.087,2.032
BOOT1: Designator141.29 R8.1 U1.48 | length 43.4
  Top Layer w0.254: R8.1@65.278,20.142 66.37,19.05 70.756,19.05 Designator141.29@71.901,20.195 72.06,20.037 76.661,20.037 v1(76.708,19.99) ; U1.48@91.823,40.312 93.144,40.312 93.45,40.005 v1(93.552,40.107)
  Bottom Layer w0.254: v1(76.708,19.99) 88.849,32.131 88.849,38.71 90.246,40.107 v1(93.552,40.107)
BP0: 
BST: C1.2@9.676,51.41 U20.8 | length 3.6
  Top Layer w0.3: U20.8@7.826,53.365 7.847,53.345 9.292,53.345 9.676,52.96 C1.2@9.676,51.41
BST1: C1_1.2 U20_1.8 | length 3.5
  Top Layer w0.3: U20_1.8@26.165,6.579 26.224,6.519 27.54,6.519 28.015,6.045 C1_1.2@28.015,4.623
"CAN RX": 
"CAN TX": 
"CD X0": 
"CD X1": 
"CD XY2": 
"CD Y0": 
"CD Y1": 
"CH340 D+": U5.5 USB_2.3 | length 64.5
  Top Layer w0.5: USB_2.3@8.782,15.748 18.059,15.748 28.905,26.594 37.328,26.594 39.311,28.577 39.311,36.111 41.046,37.846 48.184,37.846 50.408,35.622 55.858,35.622 56.667,36.431 U5.5@56.667,38.236
"CH340 D-": U5.6 USB_2.2 | length 64.4
  Top Layer w0.5: USB_2.2@8.782,16.548 16.523,16.548 27.889,27.915 27.889,37.49 29.693,39.294 48.997,39.294 51.968,36.322 54.78,36.322 55.397,36.939 U5.6@55.397,38.236
COMP: C2.1 U20.3 | length 3.3
  Top Layer w0.3: U20.3@13.462,55.905 14.173,55.905 14.834,55.245 16.359,55.245 C2.1@16.434,55.32
COMP1: C2_2.1 U20_1.3 | length 2.9
  Top Layer w0.3: U20_1.3@31.86,9.059 U20_1.3@31.801,9.119 31.86,9.178 34.451,9.178 C2_2.1@34.569,9.296
CVDD: 
D0: 
D1: 2.2@8.28,67.003 3.2@50.444,66.901 4.2@190.761,66.901 5.2@134.634,66.901 6.2@64.476,66.901 7.2@162.697,66.901 8.2@22.38,66.901 9.2@176.729,66.901 10.2@106.571,66.901 11.2@36.412,66.901 12.2@78.41,67.003 13.2@204.8,66.926 14.2@148.666,66.901 15.2@92.558,66.904 16.2 U1.26 | length 251.4
  Top Layer w0.2: 2.2@8.357,66.901 v1(8.357,68.783) v1@8.357,68.859 ; 8.2@22.38,66.901 v1@22.38,68.761 ; 11.2@36.412,66.901 36.449,66.938 v1(36.449,68.707) ; 3.2@50.419,66.926 v1(50.419,68.732) ; 6.2@64.465,66.911 v1(64.465,68.758) ; 12.2@78.41,67.003 v1(78.41,68.809) ; 10.2@106.578,66.909 v1(106.578,68.758) ; 16.2@120.602,66.901 120.625,66.923 v1(120.625,68.758) ; 5.2@134.634,66.901 134.671,66.938 v1(134.671,68.732) ; v1(148.641,68.707) 148.641,66.926 14.2@148.666,66.901 ; 7.2@162.697,66.901 162.738,66.941 v1(162.738,68.834) ; v1(176.682,68.707) 176.682,66.947 9.2@176.729,66.901 ; 4.2@190.761,66.901 190.805,66.945 v1(190.805,68.758) ; 13.2@204.775,66.952 v1(204.775,68.707)
  Top Layer w0.25: U1.26@99.323,48.312 99.289,48.346 99.323,48.38 99.339,48.397 99.339,49.657 99.247,49.749 99.247,50.225 99.292,50.27 99.292,50.625 v1(99.339,50.673)
  Top Layer w0.3: 15.2@92.481,66.958 92.558,67.035 v1(92.558,68.732) ; v1(92.558,64.668) 15.2@92.558,66.904
  Bottom Layer w0.2: v1@8.331,68.707 v1@8.357,68.707 ; v1(8.357,68.783) v1(22.403,68.783) ; v1@22.403,68.707 v1(36.449,68.707) 50.394,68.707 v1(50.419,68.732) ; v1(148.641,68.707) 162.611,68.707 v1(162.738,68.834) ; v1@162.738,68.707 v1(176.682,68.707) 190.754,68.707 v1(190.805,68.758) ; v1@190.805,68.707 v1(204.775,68.707)
  Bottom Layer w0.3: v1@50.419,68.707 v1(148.641,68.707) ; v1(92.558,64.668) 96.876,64.668 97.79,63.754 97.79,62.713 94.894,59.817 94.894,54.864 97.561,52.197 98.755,52.197 99.339,51.613 v1(99.339,50.673)
D2: 2.3@9.55,67.003 3.3@51.714,66.901 4.3@192.031,66.901 5.3@135.904,66.901 6.3@65.746,66.901 7.3@163.967,66.901 8.3@23.65,66.901 9.3@177.999,66.901 10.3@107.841,66.901 11.3@37.682,66.901 12.3@79.68,67.003 13.3@206.07,66.926 14.3@149.936,66.901 15.3@93.828,66.904 16.3 U1.27 | length 258.5
  Top Layer w0.2: 2.3@9.627,66.901 v1(9.627,69.393) ; 8.3@23.65,66.901 v1@23.65,69.339 ; 11.3@37.617,66.966 v1(37.617,69.367) ; 3.3@51.689,66.926 v1(51.689,69.393) ; 6.3@65.786,66.941 v1(65.786,69.393) ; 12.3@79.654,67.028 v1(79.654,69.393) ; 10.3@107.874,66.934 v1(107.874,69.367) ; 16.3@121.818,66.955 v1(121.818,69.393) ; v1(135.89,69.393) 135.89,66.915 5.3@135.904,66.901 ; v1(149.911,69.393) 149.911,66.926 14.3@149.936,66.901 ; 7.3@163.967,66.901 164.033,66.967 v1(164.033,69.393) ; v1(177.978,69.393) 177.978,66.922 9.3@177.999,66.901 ; 4.3@192.031,66.901 192.126,66.996 v1(192.126,69.367) ; 13.3@206.07,66.926 v1@206.07,69.317
  Top Layer w0.25: v1(98.4,51.384) 98.4,50.471 98.797,50.074 98.797,48.337 U1.27@98.823,48.312
  Top Layer w0.3: v1(93.828,69.367) 15.3@93.828,66.904 93.828,63.373 94.183,63.017 v1(96.85,63.017)
  Bottom Layer w0.2: v1(9.627,69.393) 23.597,69.393 v1(23.622,69.367) ; v1@23.622,69.393 v1(51.689,69.393) v1(65.786,69.393) v1(79.654,69.393) 93.802,69.393 v1(93.828,69.367) ; v1@93.828,69.393 v1(121.818,69.393) v1(135.89,69.393) v1(149.911,69.393) v1(164.033,69.393) v1(177.978,69.393) 178.003,69.367 v1(192.126,69.367) ; v1@192.126,69.393 v1(205.994,69.393)
  Bottom Layer w0.25: v1(96.85,63.017) 94.107,60.274 94.107,54.585 97.307,51.384 v1(98.4,51.384) v1@98.527,51.384
D3: 2.4@10.82,67.003 3.4@52.984,66.901 4.4@193.301,66.901 5.4@137.174,66.901 6.4@67.016,66.901 7.4@165.237,66.901 8.4@24.92,66.901 9.4@179.269,66.901 10.4@109.111,66.901 11.4@38.952,66.901 12.4@80.95,67.003 13.4@207.34,66.926 14.4@151.206,66.901 15.4@95.098,66.904 16.4 U1.28 | length 266.4
  Top Layer w0.2: 2.4@10.897,67.079 v1(10.897,69.977) ; 8.4@24.92,66.901 v1@24.92,70.005 ; 11.4@38.938,66.915 v1(38.938,69.977) ; 3.4@53.01,66.927 v1(53.01,69.977) ; 6.4@66.954,66.962 v1(66.954,69.977) ; 12.4@80.924,67.028 v1(80.924,69.977) ; 15.4@95.072,67.06 94.996,66.984 15.4@95.079,66.901 ; v1(109.068,69.977) 109.068,66.944 10.4@109.111,66.901 ; v1(123.012,70.053) 123.012,67.031 16.4@123.142,66.901 ; 5.4@137.174,66.901 137.185,66.912 v1(137.185,70.028) ; 14.4@151.206,66.901 151.282,66.978 v1(151.282,70.028) ; v1(165.202,69.977) 165.202,66.937 7.4@165.237,66.901 ; 9.4@179.269,66.901 179.299,66.93 v1(179.299,69.977) ; 4.4@193.301,66.901 193.345,66.945 v1(193.345,69.977) ; 13.4@207.34,66.926 v1@207.34,69.901
  Top Layer w0.25: v1(97.638,50.597) 98.298,49.937 98.298,48.337 U1.28@98.323,48.312
  Top Layer w0.3: 15.4@95.072,67.06 v1(95.072,69.977) ; 15.4@95.079,66.901 95.098,66.882 v1(95.098,63.779)
  Bottom Layer w0.2: v1(10.897,69.977) 24.892,69.977 v1(24.968,70.053) ; v1@24.968,69.977 v1(38.938,69.977) v1(53.01,69.977) v1(66.954,69.977) v1(80.924,69.977) v1(95.072,69.977) v1(109.068,69.977) 122.936,69.977 v1(123.012,70.053) ; v1@123.012,69.977 v1(165.202,69.977) v1(179.299,69.977) v1(193.345,69.977) v1(207.264,69.977)
  Bottom Layer w0.3: v1(95.098,63.779) 93.447,63.779 92.685,63.017 92.685,53.746 95.834,50.597 v1(97.638,50.597)
D4: 2.5@12.09,67.003 3.5@54.254,66.901 4.5@194.571,66.901 5.5@138.444,66.901 6.5@68.286,66.901 7.5@166.507,66.901 8.5@26.19,66.901 9.5@180.539,66.901 10.5@110.381,66.901 11.5@40.222,66.901 12.5@82.22,67.003 13.5@208.61,66.926 14.5@152.476,66.901 15.5@96.368,66.904 16.5 U1.29 | length 274.1
  Top Layer w0.2: 2.5@12.09,67.003 v1(12.09,70.637) ; 8.5@26.19,66.901 v1@26.19,70.691 ; 11.5@40.157,66.966 v1(40.157,70.637) ; 3.5@54.204,66.951 v1(54.204,70.637) ; 6.5@68.25,66.937 v1(68.25,70.637) ; v1(82.194,70.637) 82.194,67.028 12.5@82.22,67.003 ; 10.5@110.381,66.901 110.414,66.934 v1(110.414,70.637) ; 16.5@124.412,66.901 124.46,66.949 v1(124.46,70.637) ; v1(138.379,70.637) 138.379,66.966 5.5@138.444,66.901 ; v1(152.4,70.637) 152.4,66.976 14.5@152.476,66.901 ; v1(166.472,70.637) 166.472,66.937 7.5@166.507,66.901 ; v1(180.518,70.688) 180.518,66.922 9.5@180.539,66.901 ; v1(194.539,70.637) 194.539,66.933 4.5@194.571,66.901 ; 13.5@208.509,67.028 v1(208.509,70.637)
  Top Layer w0.25: v1(96.088,51.537) 96.088,51.308 97.823,49.573 U1.29@97.823,48.312
  Top Layer w0.3: v1(96.393,64.008) v1(96.393,70.688)
  Bottom Layer w0.2: v1(12.09,70.637) 26.137,70.637 v1(26.213,70.714) ; v1@26.213,70.637 v1(40.157,70.637) v1(54.204,70.637) v1(68.25,70.637) v1(82.194,70.637) 82.22,70.663 96.368,70.663 v1(96.393,70.688) ; v1@96.317,70.637 v1(110.414,70.637) v1(124.46,70.637) v1(138.379,70.637) v1(152.4,70.637) v1(166.472,70.637) 180.467,70.637 v1(180.518,70.688) ; v1@180.518,70.637 v1(194.539,70.637) v1(208.509,70.637)
  Bottom Layer w0.3: v1(96.088,51.537) 93.345,54.28 93.345,60.96 v1(96.393,64.008)
D5: 2.6@13.36,67.003 3.6@55.524,66.901 4.6@195.841,66.901 5.6@139.714,66.901 6.6@69.556,66.901 7.6@167.777,66.901 8.6@27.46,66.901 9.6@181.809,66.901 10.6@111.651,66.901 11.6@41.492,66.901 12.6@83.49,67.003 13.6@209.88,66.926 14.6@153.746,66.901 15.6@97.638,66.904 16.6 U1.44 | length 297.8
  Top Layer w0.2: 2.6@13.36,67.003 v1@13.36,71.323 ; 11.6@41.427,66.966 v1(41.427,71.349) ; 3.6@55.524,66.901 v1(55.524,71.349) ; 6.6@69.444,67.013 v1(69.444,71.349) ; 12.6@83.414,67.079 v1(83.414,71.349) ; v1(83.49,64.999) 12.6@83.49,67.003 ; v1(89.484,42.418) 89.565,42.418 89.672,42.312 U1.44@91.823,42.312 ; 10.6@111.651,66.901 111.658,66.909 v1(111.658,71.349) ; v1(125.552,71.349) 125.552,67.031 16.6@125.682,66.901 ; v1(139.675,71.349) 139.675,66.94 5.6@139.714,66.901 ; 14.6@153.746,66.901 153.772,66.927 v1(153.772,71.349) ; 7.6@167.777,66.901 167.792,66.916 v1(167.792,71.349) ; 9.6@181.809,66.901 181.839,66.93 v1(181.839,71.349) ; v1(195.732,71.323) 195.732,67.009 4.6@195.841,66.901 ; 13.6@209.88,66.926 v1(209.88,71.349)
  Top Layer w0.254: 8.6@27.46,66.901 v1@27.46,71.32
  Top Layer w0.3: 15.6@97.638,67.009 v1(97.638,71.374)
  Bottom Layer w0.2: v1(13.386,71.349) v1(27.432,71.349) v1(41.427,71.349) v1(55.524,71.349) v1(69.444,71.349) v1(83.414,71.349) v1(97.638,71.374) v1(111.658,71.349) v1(125.552,71.349) v1(139.675,71.349) v1(153.772,71.349) v1(167.792,71.349) v1(181.839,71.349) 195.707,71.349 v1(195.732,71.323) ; v1(83.49,64.999) 81.737,63.246 81.737,43.002 82.321,42.418 v1(89.484,42.418) ; v1@195.732,71.349 v1(209.88,71.349)
D6: 2.7@14.63,67.003 3.7@56.794,66.901 4.7@197.111,66.901 5.7@140.984,66.901 6.7@70.826,66.901 7.7@169.047,66.901 8.7@28.73,66.901 9.7@183.079,66.901 10.7@112.921,66.901 11.7@42.762,66.901 12.7@84.76,67.003 13.7@211.15,66.926 14.7@155.016,66.901 15.7@98.908,66.904 16.7 U1.45 | length 308.3
  Top Layer w0.2: 8.7@28.654,66.901 v1@28.654,72.187 ; 11.7@42.672,66.991 v1(42.672,72.111) ; 3.7@56.744,66.951 v1(56.744,72.111) ; 6.7@70.79,66.937 v1(70.79,72.111) ; 12.7@84.684,67.079 v1(84.684,72.161) ; v1(84.76,64.973) 12.7@84.76,67.003 ; v1(85.471,43.231) 86.89,41.812 U1.45@91.823,41.812 ; 10.7@112.921,66.901 112.979,66.959 v1(112.979,72.111) ; v1(126.949,72.111) 126.949,66.904 16.7@126.952,66.901 ; v1(140.97,72.085) 140.97,66.915 5.7@140.984,66.901 ; v1(154.965,72.136) 154.965,66.951 14.7@155.016,66.901 ; v1(168.935,72.085) 168.935,67.013 7.7@169.047,66.901 ; v1(182.931,72.136) 182.931,67.049 9.7@183.079,66.901 ; v1(197.028,72.111) 197.028,66.984 4.7@197.111,66.901 ; 13.7@211.023,67.053 v1(211.023,72.111)
  Top Layer w0.3: 2.7@14.63,67.003 v1@14.63,72.085 ; 15.7@98.908,67.035 v1(98.908,72.111)
  Bottom Layer w0.2: v1@28.626,72.111 v1(42.672,72.111) v1(56.744,72.111) v1(70.79,72.111) 84.633,72.111 v1(84.684,72.161) ; v1@84.684,72.111 v1(98.908,72.111) v1(112.979,72.111) v1(126.949,72.111) 140.945,72.111 v1(140.97,72.085) ; v1(84.76,64.973) 82.652,62.865 82.652,43.579 83,43.231 v1(85.471,43.231) ; v1@140.97,72.111 168.935,72.111 v1(197.028,72.111) v1(211.023,72.111)
  Bottom Layer w0.3: v1(14.605,72.111) v1@28.55,72.111
  other v1: 28.626,72.187
D7: 2.8@15.9,67.003 3.8@58.064,66.901 4.8@198.381,66.901 5.8@142.254,66.901 6.8@72.096,66.901 7.8@170.317,66.901 8.8@30,66.901 9.8@184.349,66.901 10.8@114.191,66.901 11.8@44.032,66.901 12.8@86.03,67.003 13.8@212.42,66.926 14.8@156.286,66.901 15.8@100.178,66.904 16.8 U1.96 | length 329
  Top Layer w0.2: 2.8@15.9,67.003 v1(15.9,72.873) ; 8.8@30,66.901 v1@30,72.844 ; 11.8@43.942,66.991 v1(43.942,72.873) ; 3.8@58.064,66.901 v1(58.064,72.873) ; 6.8@72.034,66.962 v1(72.034,72.873) ; 12.8@86.004,67.028 v1(86.004,72.873) ; v1(100.152,64.77) 100.156,64.773 100.156,66.897 15.8@100.159,66.901 ; v1(102.794,38.786) 103.124,38.786 105.823,36.087 U1.96@105.823,25.812 U1.96@105.791,25.844 ; v1(114.148,72.873) 114.148,66.944 10.8@114.191,66.901 ; v1(128.168,72.873) 128.168,66.955 16.8@128.222,66.901 ; v1(142.215,72.873) 142.215,66.94 5.8@142.254,66.901 ; v1(156.21,72.847) 156.21,66.976 14.8@156.286,66.901 ; v1(170.129,72.873) 170.129,67.089 7.8@170.317,66.901 ; v1(184.277,72.873) 184.277,66.973 9.8@184.349,66.901 ; 4.8@198.381,66.901 v1@198.381,72.815 ; 13.8@212.217,67.13 v1(212.217,72.847)
  Top Layer w0.3: 15.8@100.178,67.009 v1(100.178,72.873)
  Bottom Layer w0.2: v1(15.9,72.873) v1(29.972,72.873) ; v1@29.972,72.847 86.004,72.847 142.215,72.847 v1(156.21,72.847) 170.104,72.847 v1(170.129,72.873) ; v1(100.152,64.77) 101.498,63.424 101.498,49.657 102.749,48.406 102.749,43.951 102.845,43.856 102.794,43.805 v1(102.794,38.786) ; v1@170.129,72.847 v1(198.349,72.847) v1(212.217,72.847) v1@212.242,72.847
D8: 2.9@17.17,67.003 3.9@59.334,66.901 4.9@199.651,66.901 5.9@143.524,66.901 6.9@73.366,66.901 7.9@171.587,66.901 8.9@31.27,66.901 9.9@185.619,66.901 10.9@115.461,66.901 11.9@45.302,66.901 12.9@87.3,67.003 13.9@213.69,66.926 14.9@157.556,66.901 15.9@101.448,66.904 16.9 U1.97 | length 338.1
  Top Layer w0.2: 2.9@17.17,67.003 v1(17.17,73.482) ; 8.9@31.27,66.901 v1@31.27,73.454 ; 11.9@45.237,66.966 v1(45.237,73.457) ; 3.9@59.334,66.901 v1(59.334,73.457) ; 6.9@73.254,67.013 v1(73.254,73.482) ; 12.9@87.3,67.003 v1(87.3,73.482) ; 15.9@101.397,66.933 101.426,66.904 101.426,64.697 v1(101.422,64.694) ; v1(103.505,39.573) 106.323,36.755 U1.97@106.323,25.812 U1.97@106.341,25.83 ; v1(115.443,73.482) 115.443,66.918 10.9@115.461,66.901 ; v1(129.464,73.482) 129.464,66.929 16.9@129.492,66.901 ; 5.9@143.524,66.901 143.739,67.115 v1(143.739,73.482) ; v1(157.505,73.431) 157.505,66.951 14.9@157.556,66.901 ; 7.9@171.587,66.901 171.602,66.916 v1(171.602,73.482) ; v1(185.471,73.482) 185.471,67.049 9.9@185.619,66.901 ; v1(199.492,73.482) 199.492,67.06 4.9@199.651,66.901 ; v1(213.563,73.508) 213.563,67.053 13.9@213.69,66.926
  Top Layer w0.3: 15.9@101.397,66.933 v1(101.397,73.482)
  Bottom Layer w0.2: v1(17.17,73.482) v1(31.242,73.482) v1@45.212,73.482 ; v1@45.237,73.482 v1(73.254,73.482) v1(87.3,73.482) v1(101.397,73.482) v1(115.443,73.482) v1(129.464,73.482) v1(143.739,73.482) v1(171.602,73.482) v1(185.471,73.482) v1(199.492,73.482) 213.538,73.482 v1(213.563,73.508) ; v1(101.422,64.694) 101.981,64.135 101.981,49.886 103.149,48.717 103.149,44.145 103.505,43.79 v1(103.505,39.573)